# Altium PCB Pitot Tube.PcbDoc
Units mil, origin at the board's own origin, x right, y up, seen from the top; angles counter-clockwise.
Board outline 3590 x 565 mil, 4 copper layers (Top Layer, GND, VCC, Bottom Layer), stack 23.756 mil thick; 14 components, 8 nets, 72 pads, 10 vias.
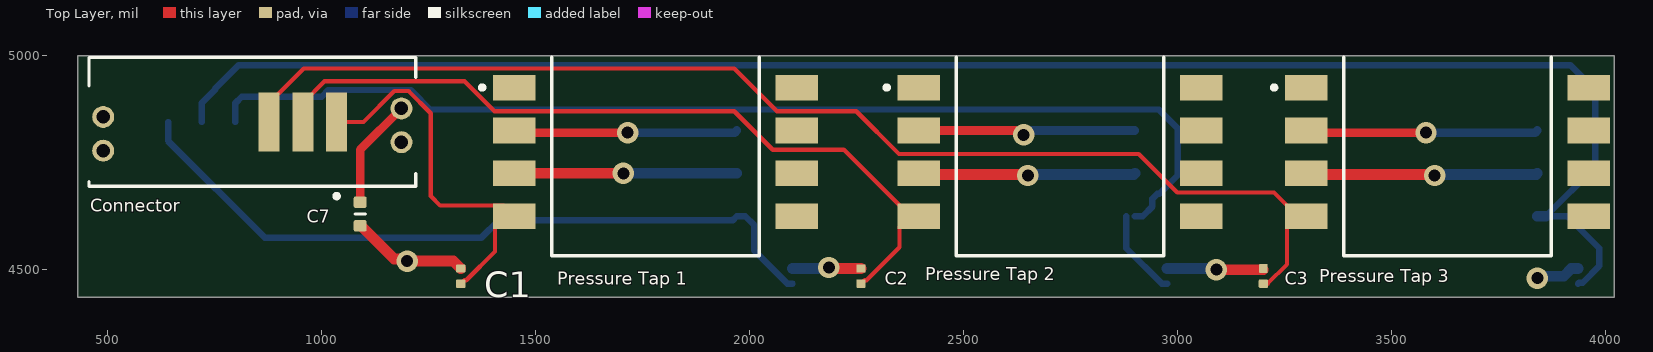
[diagram p0: Top Layer view]
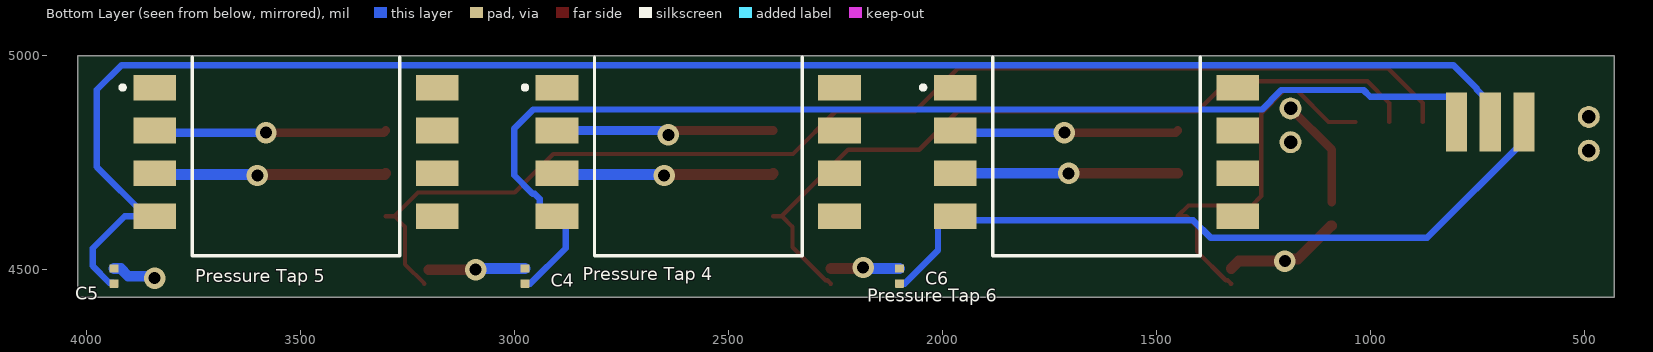
[diagram p1: Bottom Layer view, seen from below]
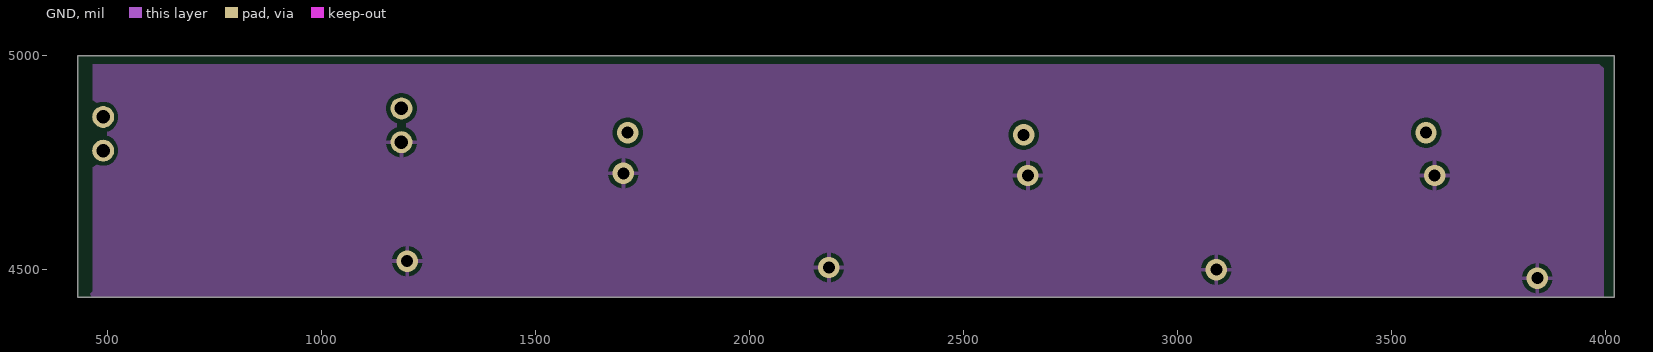
[diagram p2: GND]
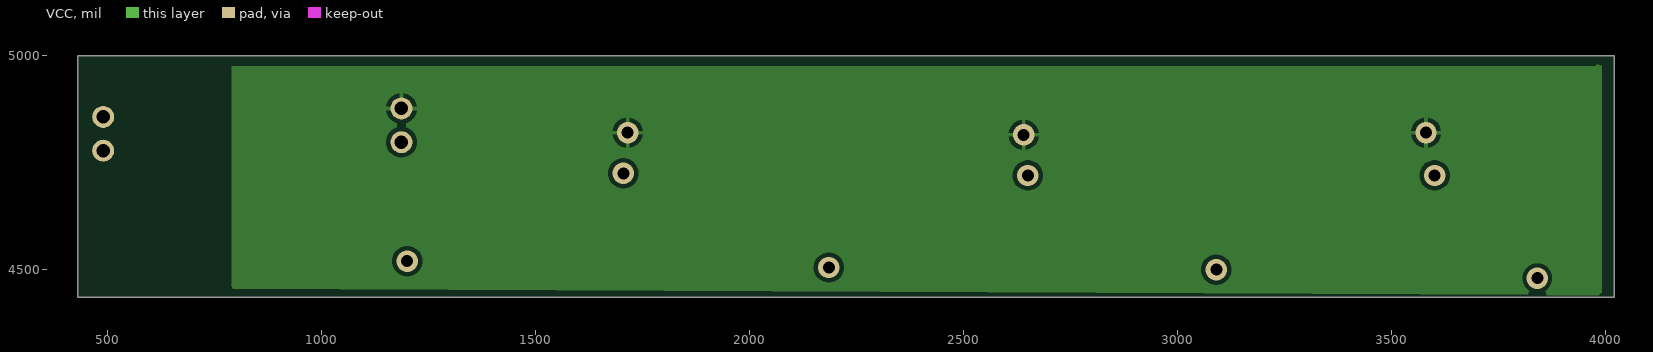
[diagram p3: VCC]
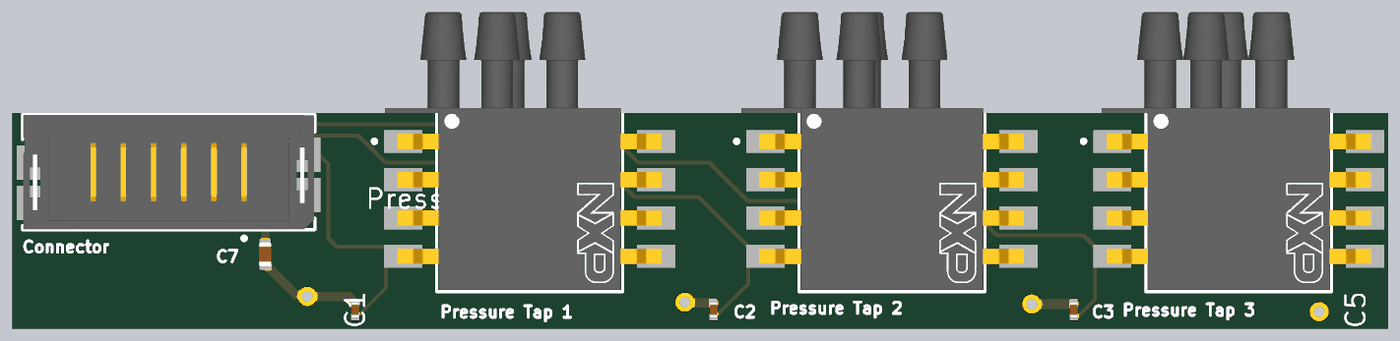
[diagram p4: 3D render of the assembled board from above, using the file's embedded part models]
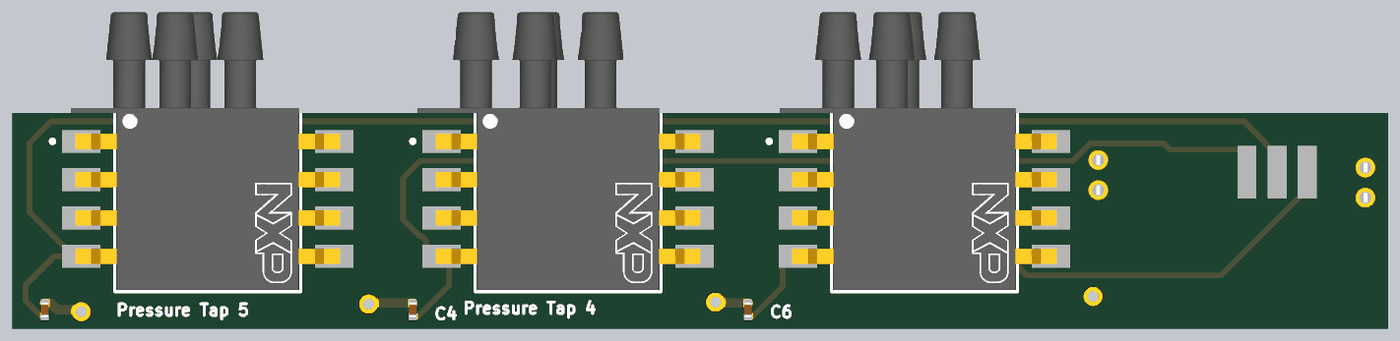
[diagram p5: 3D render of the assembled board from below, using the file's embedded part models]

## Layer stack, top to bottom
Top Solder: solder mask 0.4, Solder Resist, Dk 3.5
Top Layer: signal copper 1.4
Dielectric 2: prepreg 2.8, PP-006, Dk 4.1
GND: signal copper 1.378
Dielectric 1: dielectric 12.6, FR-4, Dk 4.8
VCC: signal copper 1.378
Dielectric 3: prepreg 2.8, PP-006, Dk 4.1
Bottom Layer: signal copper 1.4
Bottom Solder: solder mask 0.4, Solder Resist, Dk 3.5

## Board outline
430,4435 4020,4435 4020,5000 430,5000

## Design rules (kind name [scope] priority, off if disabled: settings)
Clearance [All] p1: gap=10 ignorepadtopadclearanceinfootprint=FALSE
PolygonConnect [All] p1: connectstyle=Relief reliefconductorwidth=10 reliefentries=4 polygonreliefangle="90 Angle" airgapwidth=10
RoutingVias [All] p1: holewidth=28 width=50 viastyle="Through Hole" minholewidth=28 minwidth=50 maxholewidth=28 maxwidth=50
SolderMaskExpansion [All] p1: expansion=2 istentingtop=FALSE
SupplyNets "Schematic Supply Nets_8" [InNet('V5')] p1: voltage=0.000
SupplyNets "Schematic Supply Nets_7" [InNet('V1')] p2: voltage=0.000
SupplyNets "Schematic Supply Nets_6" [InNet('V2')] p3: voltage=0.000
SupplyNets "Schematic Supply Nets_5" [InNet('V6')] p4: voltage=0.000
SupplyNets "Schematic Supply Nets_4" [InNet('V4')] p5: voltage=0.000
SupplyNets "Schematic Supply Nets_3" [InNet('+5')] p6: voltage=0.000
SupplyNets "Schematic Supply Nets_2" [InNet('V3')] p7: voltage=0.000
SupplyNets "Schematic Supply Nets_1" [InNet('GND')] p8: voltage=0.000
SupplyNets "Schematic Supply Nets" [InNet('VCC')] p9: voltage=0.000
Width [All] p1: maxlimit=40 minlimit=10 preferedwidth=10
30 further rules are at their usual default settings.

## Classes and differential pairs
component class "Pitot Tube": C1 C2 C3 C4 C5 C6 C7 Connector "Pressure Tap 1" "Pressure Tap 2" "Pressure Tap 3" "Pressure Tap 5"

## Components (designator, comment, footprint, x,y, rotation, side; value= is the part's Value field where it differs from the comment)
C1 "Capacitor 470pF +/-20% 50V 0402" CAPC0402(1005)60_L#1 1325,4485 r270 top value=470pF
C2 "Capacitor 470pF +/-20% 50V 0402" CAPC0402(1005)60_L#1 2260,4485 r270 top value=470pF
C3 "Capacitor 470pF +/-20% 50V 0402" CAPC0402(1005)60_L#2 3200,4485 r270 top value=470pF
C4 "Capacitor 470pF +/-20% 50V 0402" CAPC0402(1005)60_L#1 2975,4485 r270 bottom value=470pF
C5 "Capacitor 470pF +/-20% 50V 0402" CAPC0402(1005)60_L#1 3935,4485 r270 bottom value=470pF
C6 "Capacitor 470pF +/-20% 50V 0402" CAPC0402(1005)60_L#1 2100,4485 r270 bottom value=470pF
C7 "Capacitor 1µF +/-0.1% 25V 0603" CAPC0603(1608)100_L 1090,4630 r90 top value=1µF
Connector "UMPT-06-07.5-L-V-S-W-TR" FP-UMPT-06-07_5-L-V-S-W-T-MFG 838.11,4845 r0 top
"Pressure Tap 1" "MPXV7002DPT1" FP-SOT1693-1-MFG 1780,4775 r0 top
"Pressure Tap 2" "MPXV7002DPT1" FP-SOT1693-1-MFG 2725,4775 r0 top
"Pressure Tap 3" "MPXV7002DPT1" FP-SOT1693-1-MFG 3630,4775 r0 top
"Pressure Tap 4" "MPXV7002DPT1" FP-SOT1693-1-MFG 2570,4775 r180 bottom
"Pressure Tap 5" "MPXV7002DPT1" FP-SOT1693-1-MFG 3510,4775 r180 bottom
"Pressure Tap 6" "MPXV7002DPT1" FP-SOT1693-1-MFG 1640,4775 r180 bottom

## Footprints (in the part's own frame and the unit in brackets; to place one, negate y for a bottom-side part, rotate by r counter-clockwise, add the part's x,y. Pads: shape width x height; smd on the part's side, far side on the other; paste and mask are expansions set on the pad)
CAPC0402(1005)60_L#1 [mm] "Chip Capacitor, Body 1.0x0.5mm, Height 0.6mm, IPC High Density"
  rrect25% 0.5x0.55 smd: 1(-0.45,0) 2(0.45,0)
  body extent -0.5,-0.25 0.5,0.25, height 0.6
CAPC0402(1005)60_L#2 [mm] "Chip Capacitor, Body 1.0x0.5mm, Height 0.6mm, IPC High Density"
  rrect25% 0.55x0.5 smd: 1(-0.45,0)
  rrect25% 0.5x0.55 smd: 2(0.45,0)
  body extent -0.5,-0.25 0.5,0.25, height 0.6
CAPC0603(1608)100_L [mm] "Chip Capacitor, Body 1.6x0.8mm, Height 1.0mm, IPC High Density"
  rrect25% 0.66x0.76 smd: 1(-0.7,0) 2(0.7,0)
  silkscreen extent 0,-0.3 0,0.3, body extent -0.8,-0.4 0.8,0.4, height 0.95
FP-SOT1693-1-MFG [mil]
  rect 100x60 smd paste+0 mask+0: 1(-330,150) 2(-330,50) 3(-330,-50) 4(-330,-150) 5(330,-150) 6(330,-50) 7(330,50) 8(330,150)
  silkscreen extent -410,-242 242,221, body extent -384,-252 384,506, height 10
FP-UMPT-06-07_5-L-V-S-W-T-MFG [mm]
  rect 1.25x3.5 smd paste+0 mask+0: 1(5,0) 2(3,0) 3(1,0)
  rect 1.25x3.5 smd far side paste+0 mask+0: 4(-1,0) 5(-3,0) 6(-5,0)
  round 1.3 hole 0.8 paste-2539.97 mask+0: 7(-8.85,0.3) 8(8.85,0.8) 9(-8.85,-1.7) 10(8.85,-1.2)
  silkscreen extent -9.69,-4.52 9.69,3.83, body extent -10.18,-3.93 10.18,3.93, height 0.25

## Part data
C1 C2 C3 C4 C5 C6: library part CMP-001-00068-4, "Chip Capacitor, 470pF +/-20%, 50V, 0402, Thickness 0.6 mm", Case/Package=0402, Max Operating Temperature=85°C, Min Operating Temperature=-55°C, Tolerance=20%, Voltage Rating=50V, Mounting Technology=SMT, Pins=2
C7: library part CMP-001-00055-4, "Chip Capacitor, 1µF +/-0.1%, 25V, 0603, Thickness 1 mm", Case/Package=0603, Max Operating Temperature=85°C, Min Operating Temperature=-55°C, Tolerance=20%, Voltage Rating=25V, Mounting Technology=SMT, Pins=2
Connector: library part CMP-02770-000048-1, "CONN MPOWER 2MM MALE 6POS GOLD"
"Pressure Tap 1" "Pressure Tap 2" "Pressure Tap 3" "Pressure Tap 4" "Pressure Tap 5" "Pressure Tap 6": library part CMP-10172-000001-1, "PRESSURE SENSOR DUAL PORT 8SOP", Ambient Temperature Range High=+60°C, Ambient Temperature Range Low=+10°C, Manufacturer=NXP, Max Supply Voltage=5.25V, Min Supply Voltage=4.75V, Operating Supply Current=10mA, Output Voltage=0.5-4.5V, Package=SOT1693-1, Temperature="+10°C to +60°C", Accuracy=2.5%, Automotive=No, Category=IC, ComponentLink2Description=Datasheet, ComponentLink2URL=https://www.nxp.com/docs/en/data-sheet/MPXV7002.pdf, Device Class L1=Sensors, Device Class L2="Pressure Sensors", Device Class L3=unset, Digikey Description="PRESSURE SENSOR DUAL PORT 8SOP", Footprint Url=https://www.nxp.com/docs/en/package-information/98ASA99255D.pdf, Height=0.39inch, Lead Free=Yes, Manufacturer Part Number=MPXV7002DPT1, Max Pressure=0.3PSI, Mouser Description="Pressure Sensor 4.25V to 4.75V -2KPa to 2KPa Differential 8-Pin SNSR T/R", Octopart=https://octopart.com/mpxv7002dpt1-nxp+semiconductors-70301795, Port Style=Barbed, Pressure=-0.3-0.3PSI, Response Time=1ms, RoHS=TRUE, Sensor Output="Analog Voltage", Standoff Height=0.002inch, Temperature Range High=+60°C, Temperature Range Low=+10°C

## Via types
v1: diameter 50, hole 28, Top Layer to Bottom Layer, 10 vias

## Nets (pads, with @x,y where several pads share a name; then routed paths per layer and width w, separated by ;. In a path a pad name is that pad's centre, name@x,y a point inside that pad or via, vN(x,y) a via of type N, cw(c..) or ccw(c..) an arc to the next point about the centre after c; other vN are vias at no path point)
GND: "Pressure Tap 1.3" "Pressure Tap 2.3" "Pressure Tap 3.3" "Pressure Tap 4.3" "Pressure Tap 5.3" "Pressure Tap 6.3" C1.1 C2.1 C3.1 C4.1 C5.1 C6.1 C7.1 Connector.10 | length 2342
  Top Layer w25: C7.1 1091.96,4602.44 1169.62,4524.78 1195.22,4524.78 v1(1200,4520) 1307.72,4520 C1.1 ; 1450,4725 v1(1705,4725) ; v1(2185,4505) 2187.28,4502.72 C2.1 ; 2395,4725 2397.5,4722.5 2647.5,4722.5 v1(2650,4720) ; v1(3090,4500) C3.1@3200,4500 ; 3300,4725 3302.5,4722.5 3597.5,4722.5 v1(3600,4720)
  Bottom Layer w25: v1(1705,4725) 1970,4725 ; C6.1 2182.72,4502.72 v1(2185,4505) ; v1(2650,4720) 2652.5,4722.5 2897.5,4722.5 2900,4725 ; C4.1 3087.28,4502.72 v1(3090,4500) ; v1(3600,4720) 3602.5,4722.5 3837.5,4722.5 3840,4725 ; v1(3840,4480) 3844.78,4484.78 3901.45,4484.78 3919.39,4502.72 C5.1
V1: "Pressure Tap 1.4" C1.2 Connector.1 | length 903.4
  Top Layer w10: Connector.1 1097.64,4845 1169.72,4917.09 1203.35,4917.09 1255,4865.44 1255,4671.89 1276.89,4650 1425,4650 1450,4625 1430,4625 1405,4600 1405,4542.28 1337.94,4475.22 1333.92,4475.22 1325.98,4467.28 C1.2
V2: "Pressure Tap 2.4" C2.2 Connector.2 | length 1842.8
  Top Layer w10: Connector.2 956.22,4889.29 1006.93,4940 1333.79,4940 1403.79,4870 1963.79,4870 2053.79,4780 2220,4780 2375,4625 ; C2.2 2260.98,4467.28 2268.92,4475.22 2272.94,4475.22 2350,4552.28 2350,4600 2375,4625 ; 2395,4625 2375,4625
V3: "Pressure Tap 3.4" C3.2 Connector.3 | length 2829.9
  Top Layer w10: Connector.3 877.48,4889.29 958.19,4970 1963.79,4970 2063.79,4870 2248.79,4870 2348.79,4770 2908.79,4770 2998.79,4680 3225,4680 3280,4625 ; C3.2@3210,4467.28 3255,4512.28 3255,4600 3280,4625 ; 3300,4625 3280,4625
V4: "Pressure Tap 4.4" C4.2 Connector.4 | length 2759.7
  Bottom Layer w15: Connector.4 798.74,4889.29 813.35,4903.9 1000.29,4903.9 1015.98,4919.59 1207.92,4919.59 1232.13,4895.38 1232.13,4894.59 1252.51,4874.21 2955.54,4874.21 3000,4829.75 3000,4720.25 2957.25,4677.5 2952.5,4677.5 2940.91,4665.91 2940.91,4647.5 2918.41,4625 2900,4625 ; 2880,4625 2880,4550.2 2962.76,4467.44 2974.84,4467.44 C4.2
V5: "Pressure Tap 5.4" C5.2 Connector.5 | length 3988.1
  Bottom Layer w15: Connector.5 720,4889.29 751.63,4920.93 751.63,4923.22 805.92,4977.5 3917.5,4977.5 3975,4920 3975,4740 3860,4625 3910,4625 3985,4550 3985,4508.74 3945.89,4469.63 3937.34,4469.63 C5.2
  Bottom Layer w25: 3840,4625 3860,4625
V6: "Pressure Tap 6.4" C6.2 Connector.6 | length 1717.6
  Bottom Layer w15: Connector.6 641.26,4800.71 866.97,4575 1373.48,4575 1413.48,4615 1960,4615 1970,4625 1990,4625 2010,4605 2010,4545.2 2087.76,4467.44 2099.84,4467.44 C6.2
VCC: "Pressure Tap 1.2" "Pressure Tap 2.2" "Pressure Tap 3.2" "Pressure Tap 4.2" "Pressure Tap 5.2" "Pressure Tap 6.2" C7.2 Connector.8 | length 1840.5
  Top Layer w20: C7.2 1090,4779.96 Connector.8 ; 1450,4825 1455,4820 v1(1715,4820) ; 2395,4825 2621.88,4825 2631.88,4815 v1(2640,4815) ; 3300,4825 3305,4820 v1(3580,4820)
  Bottom Layer w20: v1(1715,4820) 1965,4820 1970,4825 ; v1(2640,4815) 2648.12,4815 2658.12,4825 2900,4825 ; v1(3580,4820) 3835,4820 3840,4825
pads on no net: "Pressure Tap 1.1" "Pressure Tap 1.5" "Pressure Tap 1.6" "Pressure Tap 1.7" "Pressure Tap 1.8" "Pressure Tap 2.1" "Pressure Tap 2.5" "Pressure Tap 2.6" "Pressure Tap 2.7" "Pressure Tap 2.8" "Pressure Tap 3.1" "Pressure Tap 3.5" "Pressure Tap 3.6" "Pressure Tap 3.7" "Pressure Tap 3.8" "Pressure Tap 4.1" "Pressure Tap 4.5" "Pressure Tap 4.6" "Pressure Tap 4.7" "Pressure Tap 4.8" "Pressure Tap 5.1" "Pressure Tap 5.5" "Pressure Tap 5.6" "Pressure Tap 5.7" "Pressure Tap 5.8" "Pressure Tap 6.1" "Pressure Tap 6.5" "Pressure Tap 6.6" "Pressure Tap 6.7" "Pressure Tap 6.8" Connector.7 Connector.9

## Polygon pours and split planes (outlines as drawn)
VCC on VCC "VCC_L03_P001" (solid, pour order 1): 780,4455 790,4465 790,4975 3975,4975 3985,4985 3990,4980 3990,4440
GND on GND "GND_L02_P000" (solid, pour order 0): 450,4435 465,4450 465,4980 3985,4980 3995,4970 3995,4435